# Altium PCB eqVcPcb.PcbDoc
Units mil, origin at the board's own origin, x right, y up, seen from the top; angles counter-clockwise.
Board outline 6000 x 4000 mil, 2 copper layers (Top Layer, Bottom Layer); 115 components, 79 nets, 309 pads, 0 vias.
Unrouted connection lines stored in the file: 230.
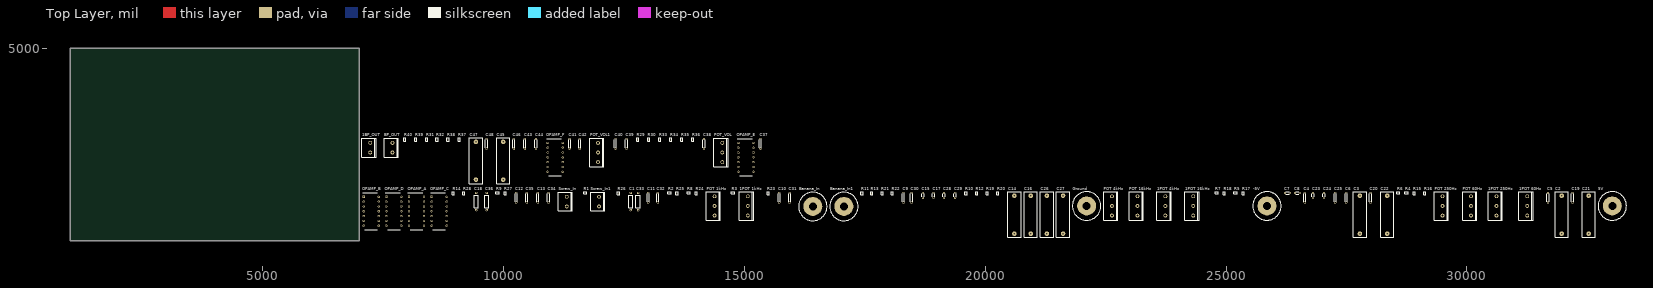
[diagram p0: Top Layer view]
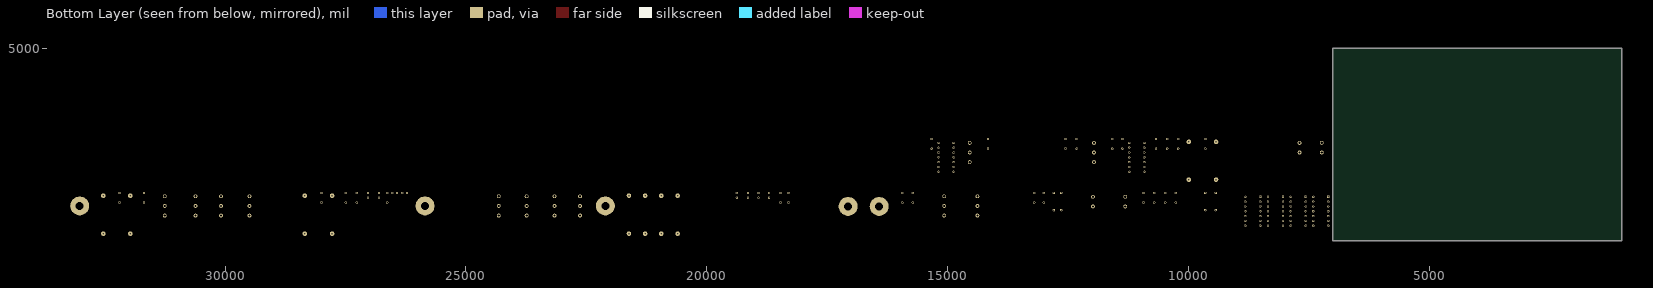
[diagram p1: Bottom Layer view, seen from below]

## Layer stack, top to bottom
Top Solder: solder mask 0.4, Solder Resist, Dk 3.5
Top Layer: signal copper 1.4
Dielectric 1: dielectric 12.6, FR-4, Dk 4.8
Bottom Layer: signal copper 1.4
Bottom Solder: solder mask 0.4, Solder Resist, Dk 3.5

## Board outline
1000,1000 7000,1000 7000,5000 1000,5000

## Design rules (kind name [scope] priority, off if disabled: settings)
Clearance [All] p1: gap=10 ignorepadtopadclearanceinfootprint=FALSE
PolygonConnect [All] p1: connectstyle=Relief reliefconductorwidth=10 reliefentries=4 polygonreliefangle="90 Angle" airgapwidth=10
RoutingVias [All] p1: holewidth=28 width=50 viastyle="Through Hole" minholewidth=28 minwidth=50 maxholewidth=28 maxwidth=50
SolderMaskExpansion [All] p1: expansion=4 istentingtop=FALSE
Width [All] p1: maxlimit=10 minlimit=10 preferedwidth=10
30 further rules are at their usual default settings.

## Classes and differential pairs
component class voltageControl: 1BP_OUT BP_OUT C37 C38 C39 C40 C41 C42 C43 C44 C45 C46 C47 C48 OPAMP_E OPAMP_F POT_VOL POT_VOL1 R29 R30 R31 R32 R33 R34 R35 R36 R37 R38 R39 R40
component class equalizer: "1POT 1kHz" "1POT 4kHz" "1POT 16kHz" "1POT 60Hz" "1POT 250Hz" 5V -5V Banana_In Banana_In1 C1 C2 C3 C4 C5 C6 C7 C8 C9 C10 C11 C12 C13 C14 C15 C16 C17 C18 C19 C20 C21 C22 C23 C24 C25 C26 C27 C28 C29 C30 C31 C32 C33 C34 C35 C36 Ground OPAMP_A OPAMP_B OPAMP_C OPAMP_D "POT 1kHz" "POT 4kHz" "POT 16kHz" "POT 60Hz" "POT 250Hz" R1 R2 R3 R4 R5 R6 R7 R8 R9 R10 R11 R12 R13 R14 R15 R16 R17 R18 R19 R20 R21 R22 R23 R24 R25 R26 R27 R28 Screw_In Screw_In1

## Components (designator, comment, footprint, x,y, rotation, side; value= is the part's Value field where it differs from the comment)
1BP_OUT "Screw 2" Screw-2 7230,2835 r90 top
"1POT 1kHz" "Screw 3" Screw-3 15070,1525 r90 top
"1POT 4kHz" "Screw 3" Screw-3 23740,1525 r90 top
"1POT 16kHz" "Screw 3" Screw-3 24320,1525 r90 top
"1POT 60Hz" "Screw 3" Screw-3 31255,1525 r90 top
"1POT 250Hz" "Screw 3" Screw-3 30615,1525 r90 top
5V "Banana Plug" "Banana Plug On top" 33020,1725 r0 top
-5V "Banana Plug" "Banana Plug On top" 25850,1725 r0 top
Banana_In "Banana Plug" "Banana Plug On top" 16420,1715 r0 top
Banana_In1 "Banana Plug" "Banana Plug On top" 17065,1715 r0 top
BP_OUT "Screw 2" Screw-2 7690,2835 r90 top
C1 "Cap" "RES THT 9mm" 12640,1640 r90 top
C2 "Cap" "Cap 20mm" 31970,1150 r90 top
C3 "Cap" "Cap 20mm" 27780,1150 r90 top
C4 "Cap" Cap-1 26635,1795 r90 top
C5 "Cap" Cap-1 31685,1795 r90 top
C6 "Cap" Cap-1 27495,1795 r90 top
C7 "Cap" Cap-0 26225,1995 r0 top
C8 "Cap" Cap-0 26430,1995 r0 top
C9 "Cap" Cap-1 18300,1795 r90 top
C10 "Cap" Cap-1 15720,1795 r90 top
C11 "Cap" Cap-1 13000,1795 r90 top
C12 "Cap" Cap-1 10260,1795 r90 top
C13 "Cap" Cap-1 10710,1795 r90 top
C14 "Cap" "Cap 20mm" 20605,1150 r90 top
C15 "Cap" Cap-0 18705,1895 r90 top
C16 "Cap" "Cap 20mm" 20945,1150 r90 top
C17 "Cap" Cap-0 18925,1895 r90 top
C18 "Cap" "RES THT 9mm" 9430,1640 r90 top
C19 "Cap" Cap-1 32195,1795 r90 top
C20 "Cap" Cap-1 28000,1795 r90 top
C21 "Cap" "Cap 20mm" 32530,1150 r90 top
C22 "Cap" "Cap 20mm" 28345,1150 r90 top
C23 "Cap" Cap-0 26805,1895 r90 top
C24 "Cap" Cap-0 27035,1895 r90 top
C25 "Cap" Cap-1 27265,1795 r90 top
C26 "Cap" "Cap 20mm" 21280,1150 r90 top
C27 "Cap" "Cap 20mm" 21615,1150 r90 top
C28 "Cap" Cap-0 19145,1895 r90 top
C29 "Cap" Cap-0 19375,1895 r90 top
C30 "Cap" Cap-1 18470,1795 r90 top
C31 "Cap" Cap-1 15940,1795 r90 top
C32 "Cap" Cap-1 13200,1795 r90 top
C33 "Cap" "RES THT 9mm" 12790,1640 r90 top
C34 "Cap" Cap-1 10930,1795 r90 top
C35 "Cap" Cap-1 10480,1795 r90 top
C36 "Cap" "RES THT 9mm" 9650,1640 r90 top
C37 "Cap" Cap-1 15330,2915 r90 top
C38 "Cap" Cap-1 14160,2915 r90 top
C39 "Cap" Cap-1 12550,2915 r90 top
C40 "Cap" Cap-1 12320,2915 r90 top
C41 "Cap" Cap-1 11370,2915 r90 top
C42 "Cap" Cap-1 11580,2915 r90 top
C43 "Cap" Cap-1 10440,2915 r90 top
C44 "Cap" Cap-1 10670,2915 r90 top
C45 "Cap" "Cap 20mm" 9990,2270 r90 top
C46 "Cap" Cap-1 10210,2915 r90 top
C47 "Cap" "Cap 20mm" 9425,2270 r90 top
C48 "Cap" Cap-1 9645,2915 r90 top
Ground "Banana Plug" "Banana Plug On top" 22105,1725 r0 top
OPAMP_A "TLC274CNE4" DIP794W53P254L1930H508Q14N 8190,1615 r0 top
OPAMP_B "TLC274CNE4" DIP794W53P254L1930H508Q14N 7250,1615 r0 top
OPAMP_C "TLC274CNE4" DIP794W53P254L1930H508Q14N 8660,1615 r0 top
OPAMP_D "TLC274CNE4" DIP794W53P254L1930H508Q14N 7720,1615 r0 top
OPAMP_E "TLC274CNE4" DIP794W53P254L1930H508Q14N 15030,2735 r0 top
OPAMP_F "TLC274CNE4" DIP794W53P254L1930H508Q14N 11070,2735 r0 top
"POT 1kHz" "Screw 3" Screw-3 14380,1525 r90 top
"POT 4kHz" "Screw 3" Screw-3 22630,1525 r90 top
"POT 16kHz" "Screw 3" Screw-3 23160,1525 r90 top
"POT 60Hz" "Screw 3" Screw-3 30085,1525 r90 top
"POT 250Hz" "Screw 3" Screw-3 29495,1525 r90 top
POT_VOL "Screw 3" Screw-3 14540,2635 r90 top
POT_VOL1 "Screw 3" Screw-3 11960,2635 r90 top
R1 "Resistor" "RES SMD 0201" 11680,2000 r0 top
R2 "Resistor" "RES SMD 0201" 13430,2000 r0 top
R3 "Resistor" "RES SMD 0201" 14750,2000 r0 top
R4 "Resistor" "RES SMD 0201" 28735,2000 r0 top
R5 "Resistor" "RES SMD 0201" 25185,2000 r0 top
R6 "Resistor" "RES SMD 0201" 28565,2000 r0 top
R7 "Resistor" "RES SMD 0201" 24795,2000 r0 top
R8 "Resistor" "RES SMD 0201" 13830,2000 r0 top
R9 "Resistor" "RES SMD 0201" 9860,2000 r0 top
R10 "Resistor" "RES SMD 0201" 19600,1975 r90 top
R11 "Resistor" "RES SMD 0201" 17440,1975 r90 top
R12 "Resistor" "RES SMD 0201" 19820,1975 r90 top
R13 "Resistor" "RES SMD 0201" 17640,1975 r90 top
R14 "Resistor" "RES SMD 0201" 8955,1975 r90 top
R15 "Resistor" "RES SMD 0201" 28905,1975 r90 top
R16 "Resistor" "RES SMD 0201" 29125,1975 r90 top
R17 "Resistor" "RES SMD 0201" 25355,1975 r90 top
R18 "Resistor" "RES SMD 0201" 24965,1975 r90 top
R19 "Resistor" "RES SMD 0201" 20040,1975 r90 top
R20 "Resistor" "RES SMD 0201" 20260,1975 r90 top
R21 "Resistor" "RES SMD 0201" 17860,1975 r90 top
R22 "Resistor" "RES SMD 0201" 18070,1975 r90 top
R23 "Resistor" "RES SMD 0201" 15490,1975 r90 top
R24 "Resistor" "RES SMD 0201" 14000,1975 r90 top
R25 "Resistor" "RES SMD 0201" 13600,1975 r90 top
R26 "Resistor" "RES SMD 0201" 12385,1975 r90 top
R27 "Resistor" "RES SMD 0201" 10030,1975 r90 top
R28 "Resistor" "RES SMD 0201" 9175,1975 r90 top
R29 "Resistor" "RES SMD 0201" 12780,3095 r90 top
R30 "Resistor" "RES SMD 0201" 13010,3095 r90 top
R31 "Resistor" "RES SMD 0201" 8405,3095 r90 top
R32 "Resistor" "RES SMD 0201" 8615,3095 r90 top
R33 "Resistor" "RES SMD 0201" 13240,3095 r90 top
R34 "Resistor" "RES SMD 0201" 13470,3095 r90 top
R35 "Resistor" "RES SMD 0201" 13700,3095 r90 top
R36 "Resistor" "RES SMD 0201" 13930,3095 r90 top
R37 "Resistor" "RES SMD 0201" 9075,3095 r90 top
R38 "Resistor" "RES SMD 0201" 8845,3095 r90 top
R39 "Resistor" "RES SMD 0201" 8175,3095 r90 top
R40 "Resistor" "RES SMD 0201" 7945,3095 r90 top
Screw_In "Screw 2" Screw-2 11310,1715 r90 top
Screw_In1 "Screw 2" Screw-2 11980,1715 r90 top

## Footprints (in the part's own frame and the unit in brackets; to place one, negate y for a bottom-side part, rotate by r counter-clockwise, add the part's x,y. Pads: shape width x height; smd on the part's side, far side on the other; paste and mask are expansions set on the pad)
"Banana Plug On top" [mm] "Banana Plug"
  round 10 hole 4.2: 1(0,0)
  silkscreen extent -7.5,-7.5 7.5,7.5
"Cap 20mm" [mm] "Capacitor with 20mm hole distance (center)"
  round 2.4 hole 0.7: 1(0,0) 2(20,0)
  silkscreen extent -2,-3.5 22,3.5
Cap-0 [mm] "Capacitor with no space"
  round 1.2 hole 0.7: 1(0,0) 2(2.54,0)
  silkscreen extent 0.45,-0.65 2.1,0.65
Cap-1 [mm] "Capacitor with 1 space"
  round 1.2 hole 0.7: 1(0,0) 2(5.08,0)
  silkscreen extent 0.45,-0.58 4.62,0.58
DIP794W53P254L1930H508Q14N [mm]
  rect 1.13x1.13 / inner round 1.13 / far side rect 1.13x1.13 hole 0.73: 1(-3.97,7.62)
  round 1.13 hole 0.73: 2(-3.97,5.08) 3(-3.97,2.54) 4(-3.97,0) 5(-3.97,-2.54) 6(-3.97,-5.08) 7(-3.97,-7.62) 8(3.97,-7.62) 9(3.97,-5.08) 10(3.97,-2.54) 11(3.97,0) 12(3.97,2.54) 13(3.97,5.08) 14(3.97,7.62)
  silkscreen extent -4.53,-9.84 3.3,9.84
"RES SMD 0201" [mm]
  rect 0.3x0.3 smd: 1(0,0) 2(0.6,0)
  silkscreen extent -0.55,-0.55 1.15,0.55, body extent 0,-0.15 0.6,0.15, height 0.25
"RES THT 9mm" [mm]
  round 1.3 hole 0.8: 1(0,0) 2(9,0)
  silkscreen extent 1.28,-1.12 7.73,1.12, body extent -0.32,-1.13 9.28,1.14, height 2.36
Screw-2 [mm] "Screw Terminal with 2 connections"
  round 2 hole 1.2: 1(0,0) 2(5.075,0)
  silkscreen extent -2.37,-3.03 7.45,4.43, body extent -3.07,-3.1 7.53,4.5, height 10
Screw-3 [mm] "Screw Terminal with 3 connections"
  round 2 hole 1.2: 1(0,0) 2(5.075,0) 3(10.15,0)
  silkscreen extent -2.37,-3.03 12.52,4.43, body extent -2.95,-3.8 12.55,4, height 10.3

## Part data
C1 C18 C33 C36: library part "Capacitor Polarised", Capacity=10uF
C2 C3 C21 C22: library part "Capacitor big ceramic", Capacity=3.3uF
C4 C25: library part "Capacitor 1 space", Capacity=22nF
C5 C19 C42 C44: library part "Capacitor 1 space", Capacity=1uF
C6 C20: library part "Capacitor 1 space", Capacity=680nF
C7 C23: library part "Capacitor 0 space", Capacity=4.7nF
C8 C24: library part "Capacitor 0 space", Capacity=1nF
C9 C10 C11 C12 C30 C31 C32 C35: library part "Capacitor 1 space", Capacity=100nF
C13 C34: library part "Capacitor 1 space", Capacity=1.2nF
C14 C26: library part "Capacitor big ceramic", Capacity=100nF
C15 C28: library part "Capacitor 0 space", Capacity=390pF
C16 C27: library part "Capacitor big ceramic", Capacity=22nF
C17 C29: library part "Capacitor 0 space", Capacity=85pF
C37 C38: library part "Capacitor 1 space", Capacity=2.2nF
C39 C40: library part "Capacitor 1 space", Capacity=1nF
C41 C43: library part "Capacitor 1 space", Capacity=1.5uF
C45 C47: library part "Capacitor big ceramic", Capacity=330nF
C46 C48: library part "Capacitor 1 space", Capacity=220nF
OPAMP_A OPAMP_B OPAMP_C OPAMP_D OPAMP_E OPAMP_F: "Precision Amplifiers Quad Single Supply Op Amp", Manufacturer_Name="Texas Instruments", Mouser Part Number=595-TLC274CNE4, Datasheet Link=https://www.ti.com/lit/ds/symlink/tlc274.pdf?ts=1639464334605&ref_url=https%253A%252F%252Fwww.ti.com%252Fstore%252Fti%252Fen%252Fp%252Fproduct%252F%253Fp%253DTLC274CN, Geometry.Height=5.08mm, Manufacturer_Part_Number=TLC274CNE4, Mouser Price/Stock=https://www.mouser.co.uk/ProductDetail/Texas-Instruments/TLC274CNE4?qs=Mkt%2FZhxPIiTvMsNXR1cCkw%3D%3D
R1 R2 R25 R26: Ohm=100K
R3 R14 R23 R28: Ohm=3.32K
R4 R6 R8 R10 R12 R15 R16 R19 R20 R24: Ohm=475
R5 R7 R9 R11 R13 R17 R18 R21 R22 R27: Ohm=100k
R29 R30 R31 R32: Ohm=1K
R33 R35 R38 R40: Ohm=3.92K
R34 R36: Ohm=7.32K
R37 R39: Ohm=7.87K

## Nets (pads, with @x,y where several pads share a name; then routed paths per layer and width w, separated by ;. In a path a pad name is that pad's centre, name@x,y a point inside that pad or via, vN(x,y) a via of type N, cw(c..) or ccw(c..) an arc to the next point about the centre after c; other vN are vias at no path point)
1_1kHz1: C34.2 OPAMP_D.1 OPAMP_D.2 R24.2
1_1kHz2: C34.1 OPAMP_D.3 R27.2
1_4kHz1: C28.2 OPAMP_D.6 OPAMP_D.7 R19.2
1_4kHz2: C28.1 OPAMP_D.5 R21.2
1_16kHz1: C29.2 OPAMP_D.13 OPAMP_D.14 R20.2
1_16kHz2: C29.1 OPAMP_D.12 R22.2
1_60Hz1: C25.2 OPAMP_C.13 OPAMP_C.14 R16.2
1_60Hz2: C25.1 OPAMP_C.12 R17.2
1_250Hz1: C23.2 C24.2 OPAMP_C.8 OPAMP_C.9 R15.2
1_250Hz2: C23.1 C24.1 OPAMP_C.10 R18.2
1A1_IN+: OPAMP_C.2 R25.1 R26.2
1A1_OUT: OPAMP_C.1 R23.2 R25.2
1BP1_IN+: C39.2 OPAMP_F.12 R36.2
1BP1_OUT: C37.2 C41.1 C45.1 OPAMP_F.13 OPAMP_F.14
1BP2_IN+: C42.2 C46.2 OPAMP_F.10 R37.2
1BP2_OUT: 1BP_OUT.1 OPAMP_F.8 OPAMP_F.9 R38.2
1BP_IN: "1POT 1kHz.1" "1POT 4kHz.1" "1POT 16kHz.1" "1POT 60Hz.1" "1POT 250Hz.1" OPAMP_C.5 R23.1
1BP_OUT: "1POT 1kHz.3" "1POT 4kHz.3" "1POT 16kHz.3" "1POT 60Hz.3" "1POT 250Hz.3" OPAMP_C.6 R28.2
1EQ_TO_VC: C36.1 POT_VOL.1
1kHz1: C13.2 OPAMP_B.1 OPAMP_B.2 R8.2
1kHz2: C13.1 OPAMP_B.3 R9.2
1OPAMP_OUT: C36.2 OPAMP_C.7 R28.1
1VOl_IN+: OPAMP_E.3 POT_VOL1.2
1VOL_OUT: OPAMP_E.1 OPAMP_E.2 R31.1
2VOL_IN-: OPAMP_E.6 R31.2 R32.1
2VOL_OUT: OPAMP_E.7 POT_VOL1.3 R32.2 R33.1
3VOl_IN+: OPAMP_E.12 POT_VOL.2
3VOL_OUT: OPAMP_E.13 OPAMP_E.14 R29.1
4kHz1: C15.2 OPAMP_B.6 OPAMP_B.7 R10.2
4kHz2: C15.1 OPAMP_B.5 R11.2
4VOL_IN-: OPAMP_E.9 R29.2 R30.1
4VOL_OUT: OPAMP_E.8 POT_VOL.3 R30.2 R35.1
5V: 5V.1 OPAMP_A.4 OPAMP_B.4 OPAMP_C.4 OPAMP_D.4 OPAMP_E.4 OPAMP_F.4
16kHz1: C17.2 OPAMP_B.13 OPAMP_B.14 R12.2
16kHz2: C17.1 OPAMP_B.12 R13.2
60Hz1: C4.2 OPAMP_A.13 OPAMP_A.14 R4.2
60Hz2: C4.1 OPAMP_A.12 R5.2
250Hz1: C7.2 C8.2 OPAMP_A.8 OPAMP_A.9 R6.2
250Hz2: C7.1 C8.1 OPAMP_A.10 R7.2
-5V: -5V.1 OPAMP_A.11 OPAMP_B.11 OPAMP_C.11 OPAMP_D.11 OPAMP_E.11 OPAMP_F.11
A1_IN+: OPAMP_A.2 R1.2 R2.1
A1_OUT: OPAMP_A.1 R2.2 R3.2
BP1_IN+: C40.2 OPAMP_F.3 R34.2
BP1_OUT: C38.2 C43.1 C47.1 OPAMP_F.1 OPAMP_F.2
BP2_IN+: C44.2 C48.2 OPAMP_F.5 R39.2
BP2_OUT: BP_OUT.1 OPAMP_F.6 OPAMP_F.7 R40.2
BP_IN: "POT 1kHz.1" "POT 4kHz.1" "POT 16kHz.1" "POT 60Hz.1" "POT 250Hz.1" OPAMP_A.5 R3.1
BP_OUT: "POT 1kHz.3" "POT 4kHz.3" "POT 16kHz.3" "POT 60Hz.3" "POT 250Hz.3" OPAMP_A.6 R14.2
EQ_TO_VC: C18.1 POT_VOL1.1
GND: 1BP_OUT.2 BP_OUT.2 C39.1 C40.1 Ground.1 OPAMP_A.3 OPAMP_B.8 OPAMP_B.9 OPAMP_B.10 OPAMP_C.3 OPAMP_D.8 OPAMP_D.9 OPAMP_D.10 OPAMP_E.5 OPAMP_E.10 R5.1 R7.1 R9.1 R11.1 R13.1 R17.1 R18.1 R21.1 R22.1 R27.1 R37.1 R39.1 Screw_In1.2 Screw_In.2
"Net1POT 1kHz_2": "1POT 1kHz.2" C30.1 C31.1 C32.1 C35.1
"Net1POT 4kHz_2": "1POT 4kHz.2" C26.1
"Net1POT 16kHz_2": "1POT 16kHz.2" C27.1
"Net1POT 60Hz_2": "1POT 60Hz.2" C21.1 C22.1
"Net1POT 250Hz_2": "1POT 250Hz.2" C19.2 C20.2
NetBanana_In1_1: Banana_In1.1 C33.2 Screw_In1.1
NetBanana_In_1: Banana_In.1 C1.2 Screw_In.1
NetC1_1: C1.1 R1.1
NetC2_1: "POT 60Hz.2" C2.1 C3.1
NetC2_2: C2.2 C3.2 R4.1
NetC5_1: C5.1 C6.1 R6.1
NetC5_2: "POT 250Hz.2" C5.2 C6.2
NetC9_1: "POT 1kHz.2" C9.1 C10.1 C11.1 C12.1
NetC9_2: C9.2 C10.2 C11.2 C12.2 R8.1
NetC14_1: "POT 4kHz.2" C14.1
NetC14_2: C14.2 R10.1
NetC16_1: "POT 16kHz.2" C16.1
NetC16_2: C16.2 R12.1
NetC19_1: C19.1 C20.1 R15.1
NetC21_2: C21.2 C22.2 R16.1
NetC26_2: C26.2 R19.1
NetC27_2: C27.2 R20.1
NetC30_2: C30.2 C31.2 C32.2 C35.2 R24.1
NetC33_1: C33.1 R26.1
NetC37_1: C37.1 R35.2 R36.1
NetC38_1: C38.1 R33.2 R34.1
NetC41_2: C41.2 C42.1 C45.2 C46.1 R38.1
NetC43_2: C43.2 C44.1 C47.2 C48.1 R40.1
OPAMP_OUT: C18.2 OPAMP_A.7 R14.1